# Altium PCB PCB1.PcbDoc
Units mil, origin at the board's own origin, x right, y up, seen from the top; angles counter-clockwise.
Board outline 2500 x 2000 mil, 2 copper layers (Top Layer, Bottom Layer); 13 components, 32 nets, 101 pads, 0 vias.
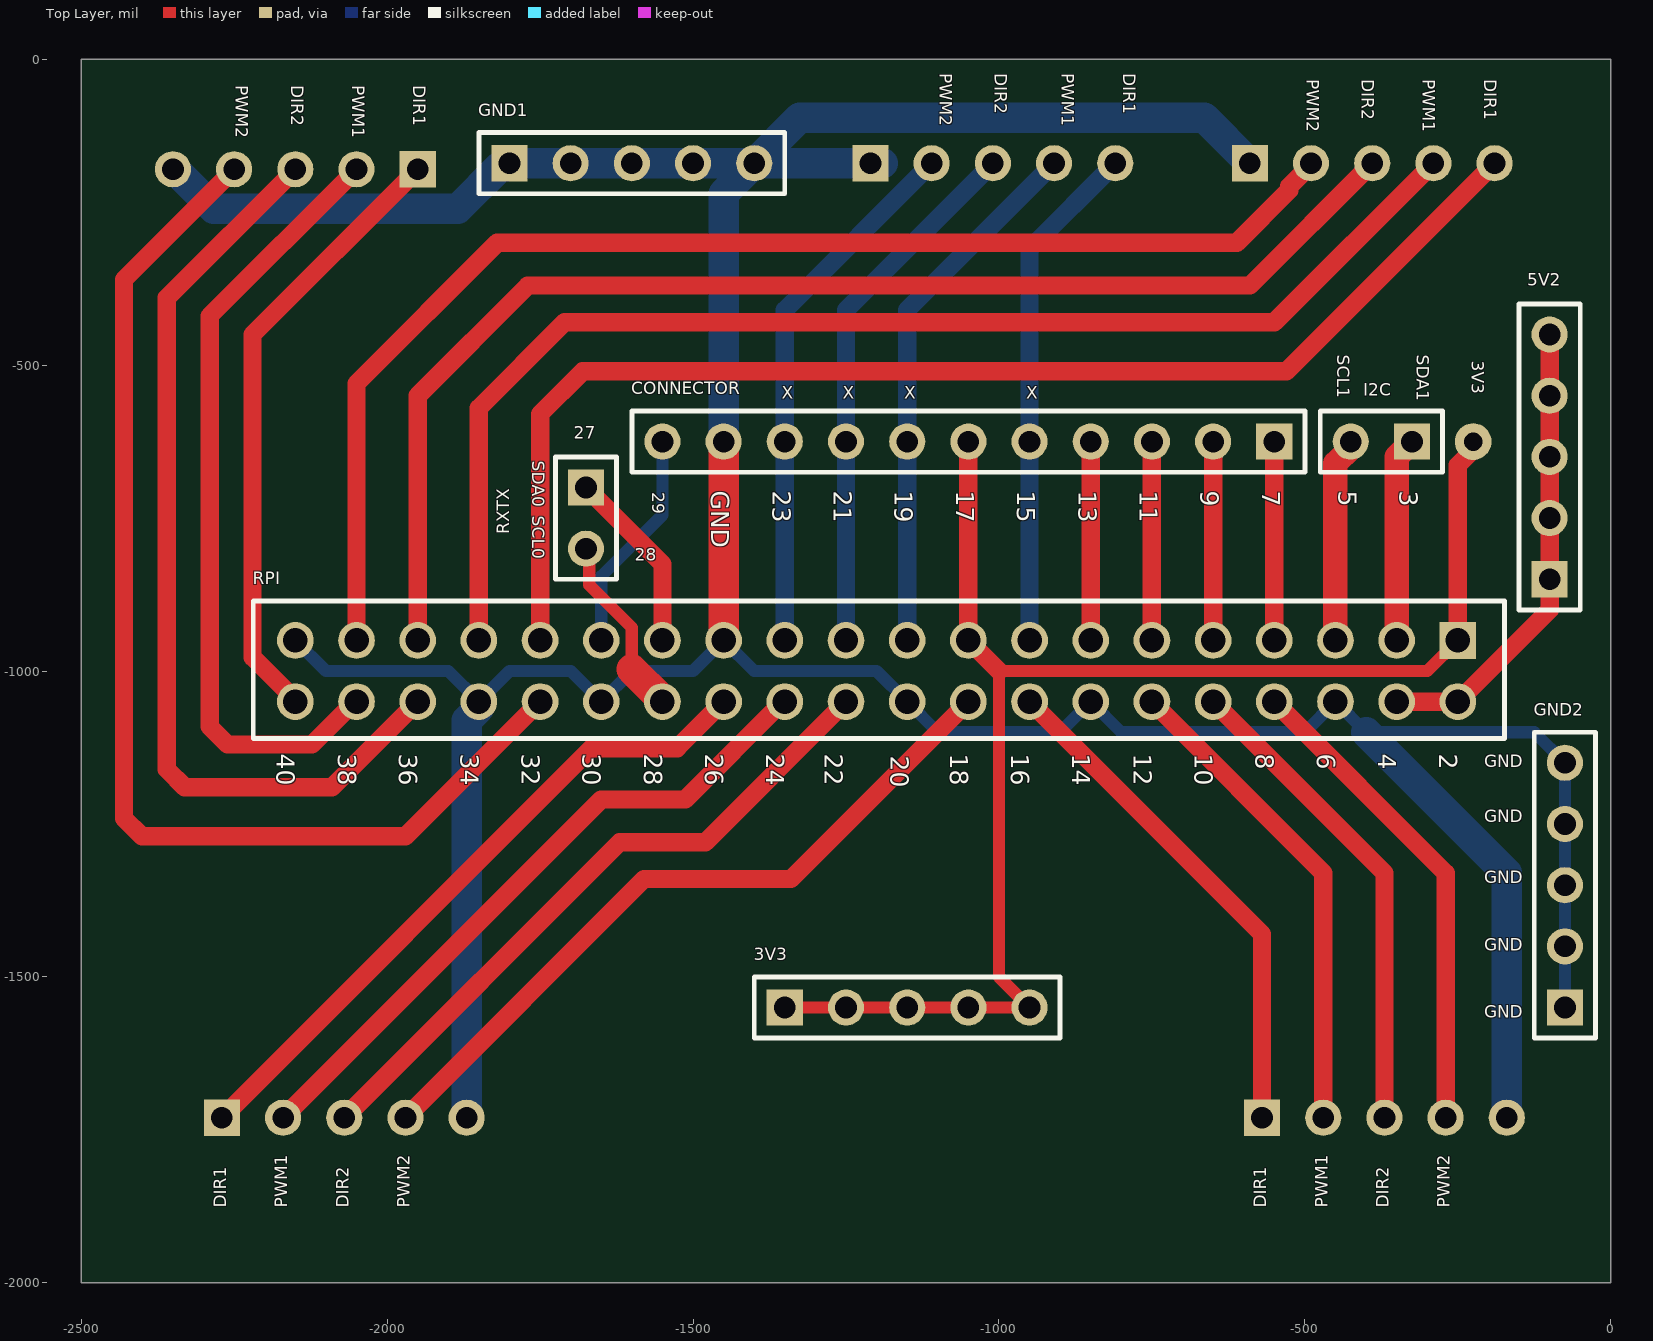
[diagram p0: Top Layer view]
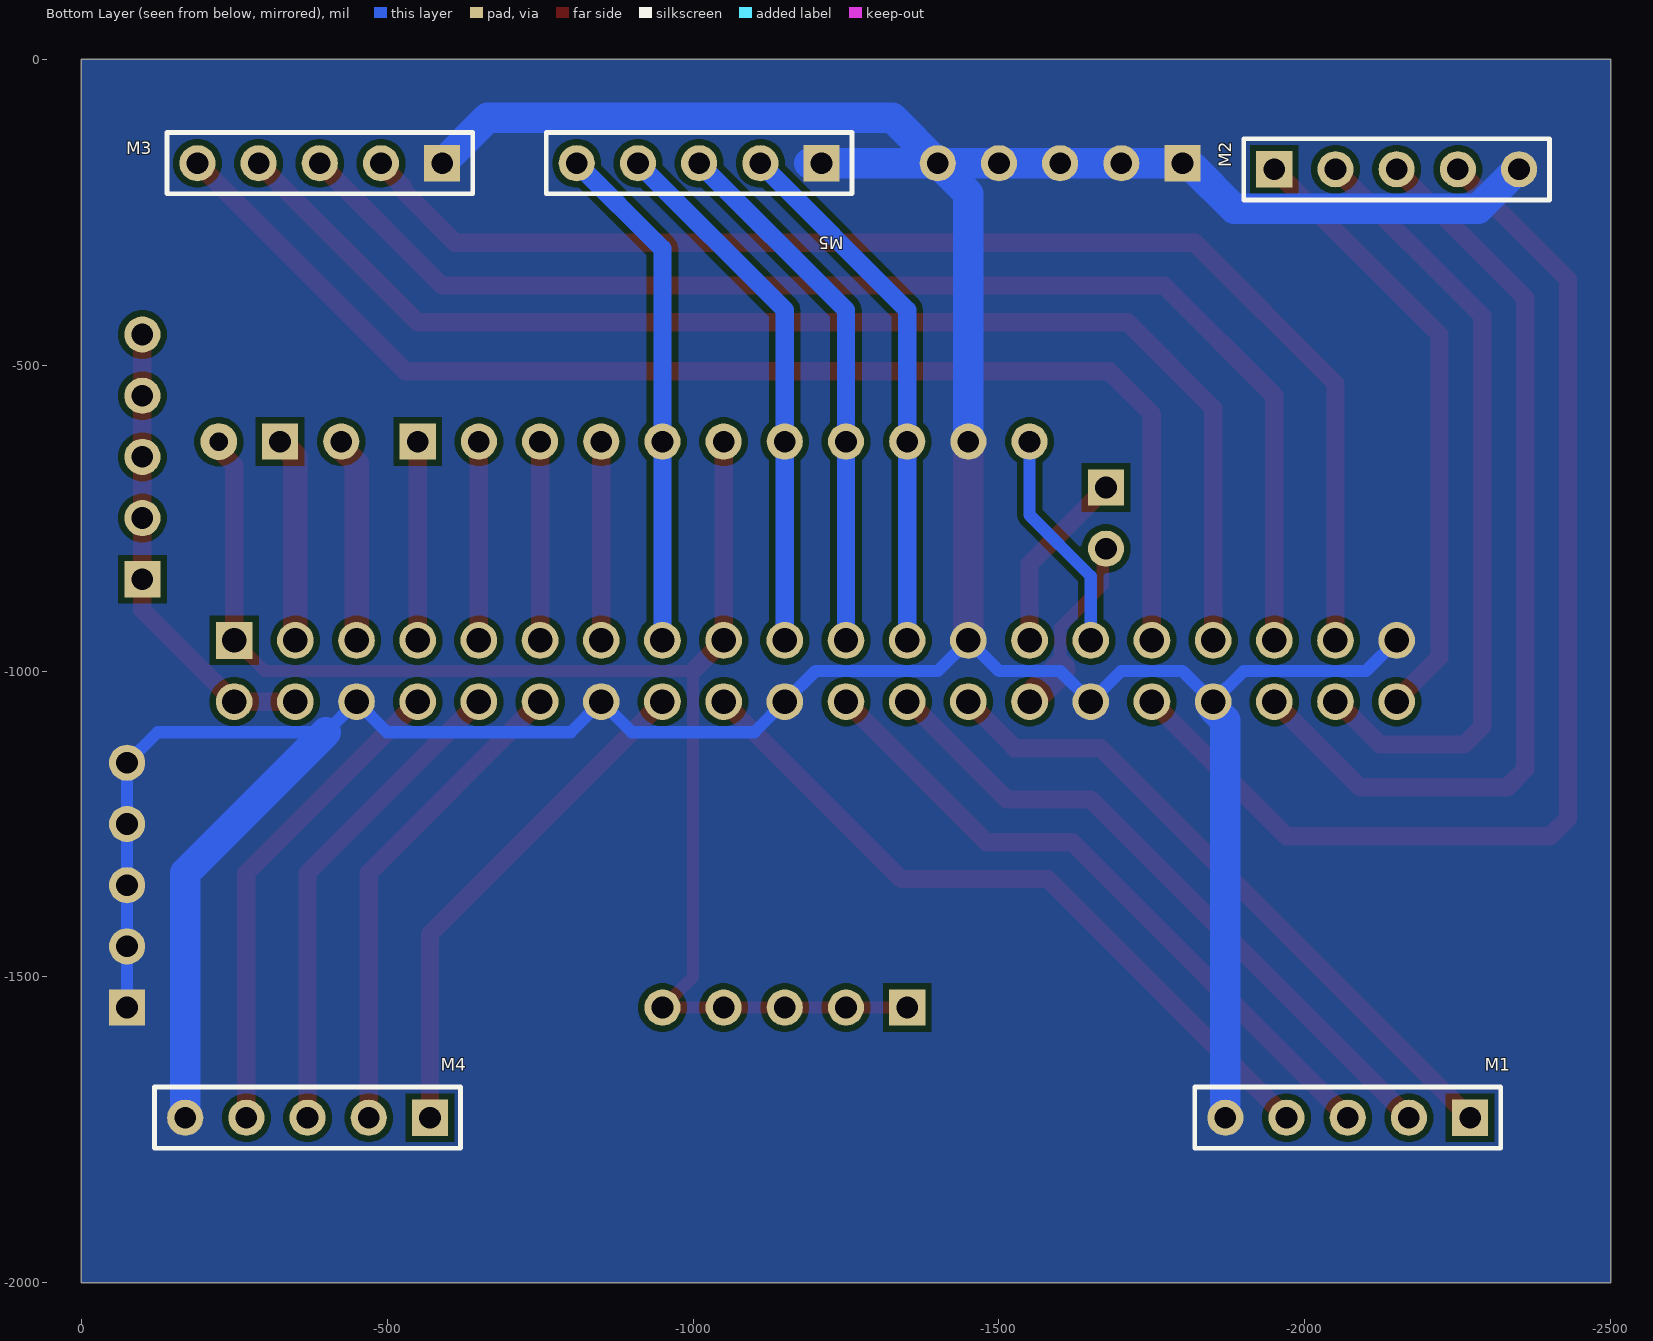
[diagram p1: Bottom Layer view, seen from below]

## Layer stack, top to bottom
Top Solder: solder mask 0.4, Solder Resist, Dk 3.5
Top Layer: signal copper 1.4
Dielectric 1: dielectric 12.6, FR-4, Dk 4.8
Bottom Layer: signal copper 1.4
Bottom Solder: solder mask 0.4, Solder Resist, Dk 3.5

## Board outline
0,0 -2500,0 -2500,-2000 0,-2000

## Design rules (kind name [scope] priority, off if disabled: settings)
Clearance Clearance_1 [OnMid vs OnMid] p1: gap=10 ignorepadtopadclearanceinfootprint=FALSE sourcerule=37 cellrowname=All cellrowtype=0 cellcolname=All cellcoltype=0 innerlayers=TRUE
Clearance Clearance_2 [(ExistsOnLayer('Top Layer') Or ExistsOnLayer('Bottom Layer')) vs (ExistsOnLayer('Top Layer') Or ExistsOnLayer('Bottom Layer'))] p2: gap=10 ignorepadtopadclearanceinfootprint=FALSE sourcerule=37 cellrowname=All cellrowtype=0 cellcolname=All cellcoltype=0 outerlayers=TRUE
Clearance [All] p3: gap=10 ignorepadtopadclearanceinfootprint=FALSE ismatrix=TRUE
PlaneConnect [All] p1: planeconnectstyle=Direct reliefexpansion=20 reliefentries=4 reliefconductorwidth=10 reliefairgap=10
PolygonConnect [All] p1: connectstyle=Direct reliefconductorwidth=10 reliefentries=4 polygonreliefangle="90 Angle" airgapwidth=10
RoutingVias [All] p1: holewidth=28 width=50 viastyle="Through Hole" minholewidth=28 minwidth=50 maxholewidth=28 maxwidth=50
SolderMaskExpansion [All] p1: expansion=4 istentingtop=FALSE
Width [All] p1: maxlimit=50 minlimit=10 preferedwidth=30 minimp=50.000000 maximp=50.000000 favimp=50.000000
Width MaxMinWidth_1 [All] p2: maxlimit=70 minlimit=30 preferedwidth=50
29 further rules are at their usual default settings.

## Components (designator, comment, footprint, x,y, rotation, side; value= is the part's Value field where it differs from the comment)
3V3 "Header 5" HDR1X5 -1350,-1550 r0 top
5V2 "Header 5" HDR1X5 -100,-850 r90 top
CONNECTOR "Header 11" HDR1X11 -550,-625 r180 top
GND1 "Header 5" HDR1X5 -1800,-170 r0 top
GND2 "Header 5" HDR1X5 -75,-1550 r90 top
I2C "Header 2" HDR1X2 -325,-625 r180 top
M1 "Header 5" HDR1X5 -2270,-1730 r0 bottom
M2 "Header 5" HDR1X5 -1950,-180 r180 bottom
M3 "Header 5" HDR1X5 -590,-170 r0 bottom
M4 "Header 5" HDR1X5 -570,-1730 r0 bottom
M5 "Header 5" HDR1X5 -1210,-170 r0 bottom
RPI "RASPBERRY_PI_3_MODEL_B+" MODULE_RASPBERRY_PI_3_MODEL_B+ -1200,-1000 r180 top
RXTX "Header 2" HDR1X2 -1675,-700 r270 top

## Footprints (in the part's own frame and the unit in brackets; to place one, negate y for a bottom-side part, rotate by r counter-clockwise, add the part's x,y. Pads: shape width x height; smd on the part's side, far side on the other; paste and mask are expansions set on the pad)
HDR1X2 [mm] "Connector; Header; 2 Position"
  rect 1.5x1.5 hole 0.9: 1(0,0)
  round 1.5 hole 0.9: 2(2.54,0)
  silkscreen extent -1.27,-1.27 3.81,1.27
HDR1X5 [mm] "Connector; Header; 5 Position"
  rect 1.5x1.5 hole 0.9: 1(0,0)
  round 1.5 hole 0.9: 2(2.54,0) 3(5.08,0) 4(7.62,0) 5(10.16,0)
  silkscreen extent -1.27,-1.27 11.43,1.27
HDR1X11 [mm] "Connector; Header; 11 Position"
  rect 1.5x1.5 hole 0.9: 1(0,0)
  round 1.5 hole 0.9: 2(2.54,0) 3(5.08,0) 4(7.62,0) 5(10.16,0) 6(12.7,0) 7(15.24,0) 8(17.78,0) 9(20.32,0) 10(22.86,0) 11(25.4,0)
  silkscreen extent -1.27,-1.27 26.67,1.27
MODULE_RASPBERRY_PI_3_MODEL_B+ [mil]
  rect 60x60 / inner round 60 / far side rect 60x60 hole 40: 1(-950,-50)
  round 60 hole 40: 2(-950,50) 3(-850,-50) 4(-850,50) 5(-750,-50) 6(-750,50) 7(-650,-50) 8(-650,50) 9(-550,-50) 10(-550,50) 11(-450,-50) 12(-450,50) 13(-350,-50) 14(-350,50) 15(-250,-50) 16(-250,50) 17(-150,-50) 18(-150,50) 19(-50,-50) 20(-50,50) 21(50,-50) 22(50,50) 23(150,-50) 24(150,50) 25(250,-50) 26(250,50) 27(350,-50) 28(350,50) 29(450,-50) 30(450,50) 31(550,-50) 32(550,50) 33(650,-50) 34(650,50) 35(750,-50) 36(750,50) 37(850,-50) 38(850,50) 39(950,-50) 40(950,50)
  silkscreen extent -1026,-115 1019,110

## Part data
3V3 5V2 GND1 GND2 M1 M2 M3 M4 M5: "Header, 5-Pin", LatestRevisionDate=17-Jul-2002, LatestRevisionNote="Re-released for DXP Platform.", Publisher="Altium Limited"
CONNECTOR: "Header, 11-Pin", LatestRevisionDate=17-Jul-2002, LatestRevisionNote="Re-released for DXP Platform.", Publisher="Altium Limited"
I2C RXTX: "Header, 2-Pin", LatestRevisionDate=17-Jul-2002, LatestRevisionNote="Re-released for DXP Platform.", Publisher="Altium Limited"
RPI: "Case Plastic, ABS Black Hand Held, Split Sides 3.520 L x 2.740 W (89.41mm x 69.60mm) X 0.980 (24.89mm)", Package="Raspberry Pi", Availability="In Stock", Check_prices=https://www.snapeda.com/parts/RASPBERRY%20PI%203%20MODEL%20B+/Raspberry+Pi/view-part/?ref=eda, MF="Raspberry Pi", MP="RASPBERRY PI 3 MODEL B+", Price=None, Purchase-URL="https://pricing.snapeda.com/search/part/RASPBERRY PI 3 MODEL B+/?ref=eda", SnapEDA_Link=https://www.snapeda.com/parts/RASPBERRY%20PI%203%20MODEL%20B+/Raspberry+Pi/view-part/?ref=snap

## Free pads (board coordinates)
  round 60 hole 30: 1(-225,-625)

## Nets (pads, with @x,y where several pads share a name; then routed paths per layer and width w, separated by ;. In a path a pad name is that pad's centre, name@x,y a point inside that pad or via, vN(x,y) a via of type N, cw(c..) or ccw(c..) an arc to the next point about the centre after c; other vN are vias at no path point)
3v3: 3V3.1 3V3.2 3V3.3 3V3.4 3V3.5 CONNECTOR.6 pad.1 RPI.1 RPI.17 | length 2472.5
  Top Layer w20: 3V3.1 3V3.2 3V3.3 3V3.4 3V3.5 -1000,-1500 -1000,-1000 -300,-1000 RPI.1
  Top Layer w30: CONNECTOR.6 RPI.17 -1000,-1000 ; RPI.1 -250,-663.53 -225,-638.53 pad.1
5V: 5V2.1 5V2.2 5V2.3 5V2.4 5V2.5 RPI.2 RPI.4 | length 762.1
  Top Layer w30: RPI.4 RPI.2 -100,-900 5V2.1 5V2.2 5V2.3 5V2.4 5V2.5
DIR11: M1.1 RPI.26 | length 1101.7
  Top Layer w30: M1.1 -1665.96,-1125.96 -1525.96,-1125.96 RPI.26
DIR21: M2.1 RPI.40 | length 1010.8
  Top Layer w30: RPI.40 -2150,-1047.29 -2220,-977.29 -2220,-450 M2.1
DIR22: M2.3 RPI.36 | length 1547.8
  Top Layer w30: M2.3 -2360,-390 -2360,-1160.71 -2330.71,-1190 -2090,-1190 RPI.36
DIR31: M3.5 RPI.31 | length 2099.8
  Top Layer w30: RPI.31 -1750,-580 -1680,-510 -530,-510 M3.5
DIR32: M3.3 RPI.35 | length 2117.4
  Top Layer w30: RPI.35 -1950,-550 -1770,-370 -590,-370 M3.3
DIR41: M4.1 RPI.16 | length 837.4
  Top Layer w30: RPI.16 -570,-1430 M4.1
DIR42: M4.3 RPI.10 | length 796
  Top Layer w30: RPI.10 -370,-1330 M4.3
DIR121: M1.3 RPI.22 | length 1101.7
  Top Layer w30: M1.3 -1620,-1280 -1480,-1280 RPI.22
GND: CONNECTOR.10 GND1.1 GND1.2 GND1.3 GND1.4 GND1.5 GND2.1 GND2.2 GND2.3 GND2.4 GND2.5 M1.5 M2.5 M3.1 M4.5 M5.1 RPI.6 RPI.14 RPI.20 RPI.25 RPI.30 RPI.34 RPI.39 | length 7066.1
  Top Layer w50: RPI.25 CONNECTOR.10
  Bottom Layer w20: RPI.39 -2100,-1000 -1900,-1000 RPI.34 ; RPI.34@-1850,-1060.82 RPI.34 ; GND2.1 GND2.2 GND2.3 GND2.4 GND2.5 -125,-1100 -400,-1100 RPI.6 -500,-1100 -800,-1100 RPI.14 -900,-1100 -1100,-1100 RPI.20 -1200,-1000 -1400,-1000 RPI.25 -1500,-1000 -1600,-1000 RPI.30 -1700,-1000 -1800,-1000 RPI.34
  Bottom Layer w50: M2.5 -2347.55,-180 -2283.02,-244.53 -1884.53,-244.53 -1814.53,-174.53 -1804.53,-174.53 GND1.1 GND1.2 GND1.3 GND1.4 GND1.5 ; M1.5 -1870,-1080.82 RPI.34@-1850,-1060.82 ; CONNECTOR.10 -1450,-220 GND1.5 ; GND1.5@-1397.55,-170 M5.1@-1190,-170 ; M3.1 -664.53,-95.47 -1325.47,-95.47 GND1.5 ; -400,-1100 -170,-1330 M4.5
PIN7: CONNECTOR.1 RPI.7 | length 325
  Top Layer w30: RPI.7 CONNECTOR.1
PIN9: CONNECTOR.2 RPI.9 | length 325
  Top Layer w30: RPI.9 CONNECTOR.2
PIN11: CONNECTOR.3 RPI.11 | length 325
  Top Layer w30: RPI.11 CONNECTOR.3
PIN13: CONNECTOR.4 RPI.13 | length 325
  Top Layer w30: RPI.13 CONNECTOR.4
PIN15: CONNECTOR.5 M5.5 RPI.15 | length 838
  Bottom Layer w30: RPI.15 CONNECTOR.5 -950,-310 M5.5
PIN19: CONNECTOR.7 M5.4 RPI.19 | length 879.4
  Bottom Layer w30: RPI.19 CONNECTOR.7 -1150,-410 M5.4
PIN21: CONNECTOR.8 M5.3 RPI.21 | length 879.4
  Bottom Layer w30: RPI.21 CONNECTOR.8 -1250,-410 M5.3
PIN23: CONNECTOR.9 M5.2 RPI.23 | length 879.4
  Bottom Layer w30: RPI.23 CONNECTOR.9 -1350,-410 M5.2
PIN29: CONNECTOR.11 RPI.29 | length 366.4
  Bottom Layer w20: RPI.29 -1650,-845.04 -1550,-745.04 CONNECTOR.11
PWM11: M1.2 RPI.24 | length 1101.7
  Top Layer w30: M1.2 -1650,-1210 -1512.71,-1210 -1352.71,-1050 RPI.24
PWM21: M2.2 RPI.38 | length 1291.2
  Top Layer w30: RPI.38 -2052.71,-1050 -2122.71,-1120 -2260.71,-1120 -2290,-1090.71 -2290,-420 M2.2
PWM22: M2.4 RPI.32 | length 1918.5
  Top Layer w30: M2.4 -2430,-360 -2430,-1240.71 -2400.71,-1270 -1970,-1270 RPI.32
PWM31: M3.4 RPI.33 | length 2105.7
  Top Layer w30: RPI.33 -1850,-570 -1710,-430 -550,-430 M3.4
PWM32: M3.2 RPI.37 | length 2134.1
  Top Layer w30: RPI.37 -2050,-530 -1820,-300 -611.45,-300 -525.47,-214.03 -525.47,-207.92 -490,-172.45 M3.2
PWM41: M4.2 RPI.12 | length 796
  Top Layer w30: RPI.12 -470,-1330 M4.2
PWM42: M4.4 RPI.8 | length 796
  Top Layer w30: RPI.8 -270,-1330 M4.4
PWM121: M1.4 RPI.18 | length 1201.7
  Top Layer w30: M1.4 -1580,-1340 -1340,-1340 RPI.18
SCL0: RPI.28 RXTX.2 | length 301.8
  Top Layer w20: RXTX.2 -1669.76,-805.24 -1669.76,-859.53 -1600,-929.29 -1600,-997.29
  Top Layer w50: -1600,-997.29 -1550,-1047.29 RPI.28
SCL1: I2C.2 RPI.5 | length 335.4
  Top Layer w40: RPI.5 -450,-660.57 -425,-635.57 I2C.2
SDA0: RPI.27 RXTX.1 | length 301.8
  Top Layer w30: RXTX.1 -1550,-825 RPI.27
SDA1: I2C.1 RPI.3 | length 335.4
  Top Layer w40: RPI.3 -350,-650 I2C.1

## Polygon pours and split planes (outlines as drawn)
GND on Bottom Layer "GND_L02_P002" (solid, remove dead copper, pour order 2): 0,0 -2500,0 -2500,-2000 0,-2000

## Silkscreen, mask and mechanical layers (free items; w line width, h text height)
Top Overlay:
  text "PWM2" at -1097,-23 h20 r270
  text "DIR2" at -1007,-23 h20 r270
  text "PWM1" at -897,-23 h20 r270
  text "DIR1" at -797,-23 h20 r270
  text "PWM2" at -497,-33 h20 r270
  text "DIR2" at -407,-33 h20 r270
  text "PWM1" at -307,-33 h20 r270
  text "DIR1" at -207,-33 h20 r270
  text "PWM2" at -2247,-43 h20 r270
  text "DIR2" at -2157,-43 h20 r270
  text "PWM1" at -2057,-43 h20 r270
  text "DIR1" at -1957,-43 h20 r270
  text "SCL1" at -447,-483 h20 r270
  text "SDA1" at -317,-483 h20 r270
  text "3V3" at -227,-493 h20 r270
  text "X" at -1355,-555 h20
  text "X" at -1255,-555 h20
  text "X" at -1155,-555 h20
  text "X" at -955,-555 h20
  text "27" at -1695,-620 h20
  text "SDA0" at -1762.55,-656.08 h20 r270
  text "GND" at -1470,-705 h30 r270
  text "23" at -1370,-705 h30 r270
  text "21" at -1270,-705 h30 r270
  text "19" at -1170,-705 h30 r270
  text "17" at -1070,-705 h30 r270
  text "15" at -970,-705 h30 r270
  text "13" at -870,-705 h30 r270
  text "11" at -770,-705 h30 r270
  text "9" at -670,-705 h30 r270
  text "7" at -570,-705 h30 r270
  text "5" at -445,-705 h30 r270
  text "3" at -345,-705 h30 r270
  text "29" at -1567,-708 h20 r270
  text "SCL0" at -1762.55,-746.08 h20 r270
  text "28" at -1595,-820 h20
  text "GND" at -207,-1157 h20
  text "GND" at -207,-1247 h20
  text "GND" at -207,-1347 h20
  text "GND" at -207,-1457 h20
  text "GND" at -207,-1567 h20
  text "DIR1" at -2263,-1877 h20 r90
  text "PWM1" at -2163,-1877 h20 r90
  text "DIR2" at -2063,-1877 h20 r90
  text "PWM2" at -1963,-1877 h20 r90
  text "DIR1" at -563,-1877 h20 r90
  text "PWM1" at -463,-1877 h20 r90
  text "DIR2" at -363,-1877 h20 r90
  text "PWM2" at -263,-1877 h20 r90
Mechanical 1:
  lines w10: -2000,0 -2500,0 ; -2500,0 -2500,-2000 0,-2000 0,0 -2500,0

## Text inside footprints (layer, text, board x,y; h text height)
RPI: Top Overlay "2" at -280,-1135 h30 r270; Top Overlay "4" at -380,-1135 h30 r270; Top Overlay "6" at -480,-1135 h30 r270; Top Overlay "8" at -580,-1135 h30 r270; Top Overlay "10" at -680,-1135 h30 r270; Top Overlay "12" at -780,-1135 h30 r270; Top Overlay "14" at -880,-1135 h30 r270; Top Overlay "16" at -980,-1135 h30 r270; Top Overlay "18" at -1080,-1135 h30 r270; Top Overlay "20" at -1176.64,-1138.28 h30 r270; Top Overlay "24" at -1380,-1135 h30 r270; Top Overlay "26" at -1480,-1135 h30 r270; Top Overlay "22" at -1285,-1135 h30 r270; Top Overlay "28" at -1580,-1135 h30 r270; Top Overlay "30" at -1680,-1135 h30 r270; Top Overlay "32" at -1780,-1135 h30 r270; Top Overlay "34" at -1880,-1135 h30 r270; Top Overlay "36" at -1980,-1135 h30 r270; Top Overlay "38" at -2080,-1135 h30 r270; Top Overlay "40" at -2180,-1135 h30 r270